# Altium PCB Wctrl-pcb1.PcbDoc (part 1 of 2)
Units mm, origin at the board's own origin, x right, y up, seen from the top; angles counter-clockwise.
Board outline 71 x 39 mm, 4 copper layers (Top Layer, Layer 1, Layer 2, Bottom Layer), stack 1.812 mm thick; 64 components, 75 nets, 267 pads, 81 vias.
Unrouted connection lines stored in the file: 1.
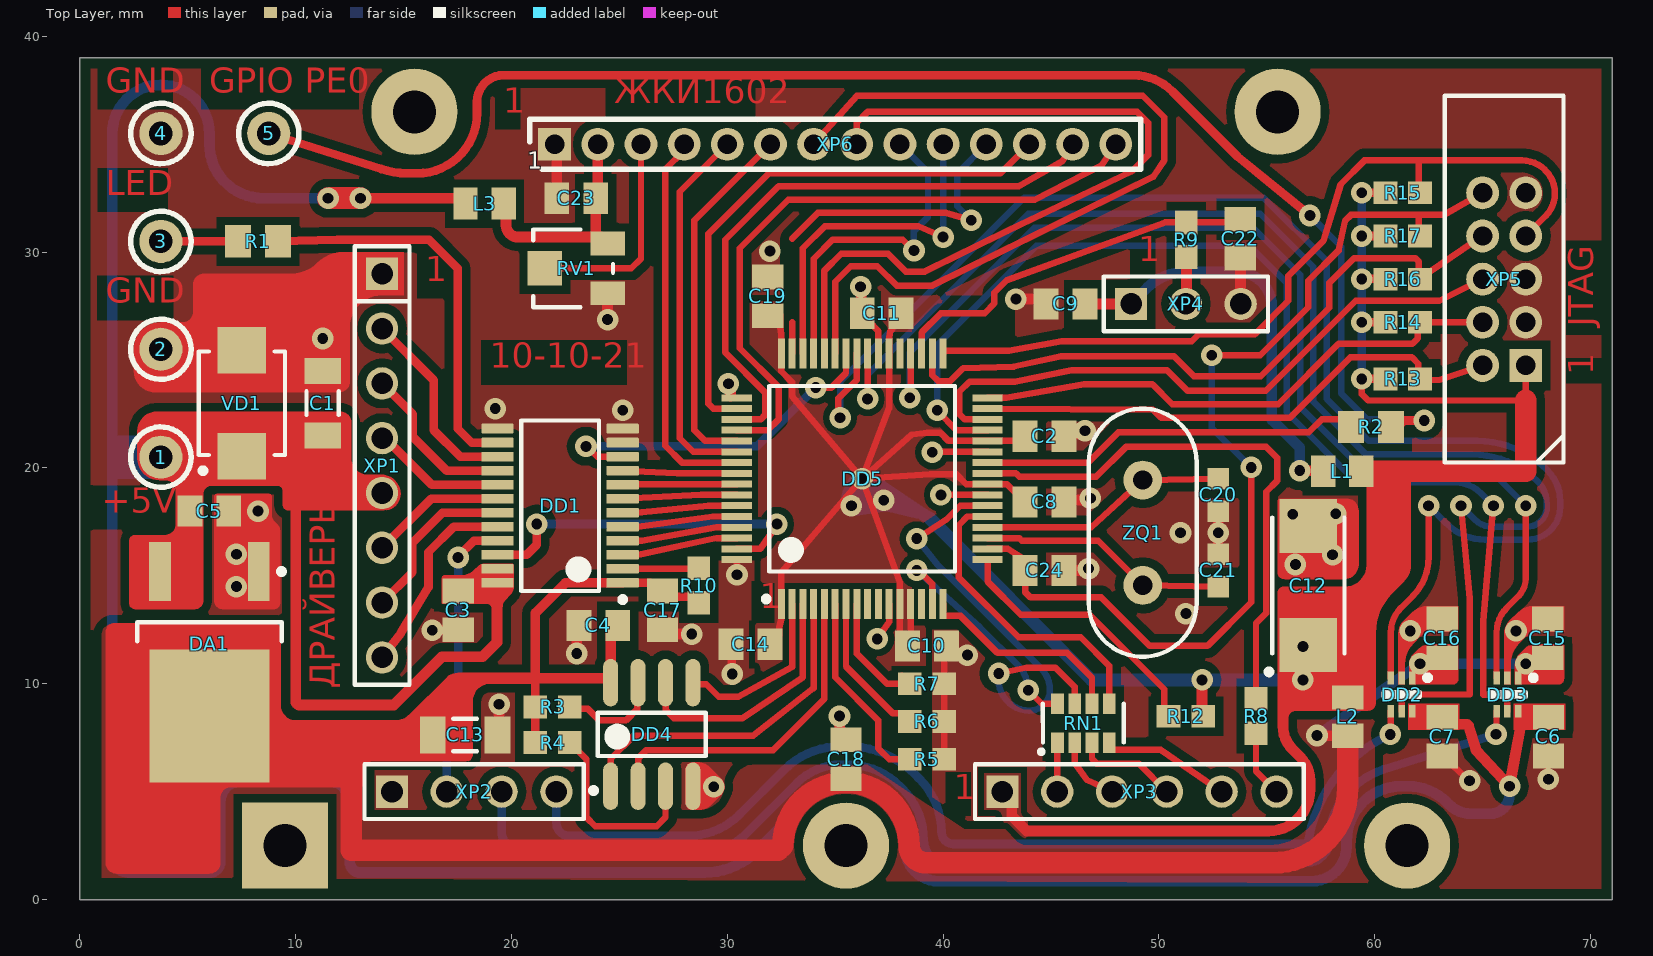
[diagram p0: Top Layer view]
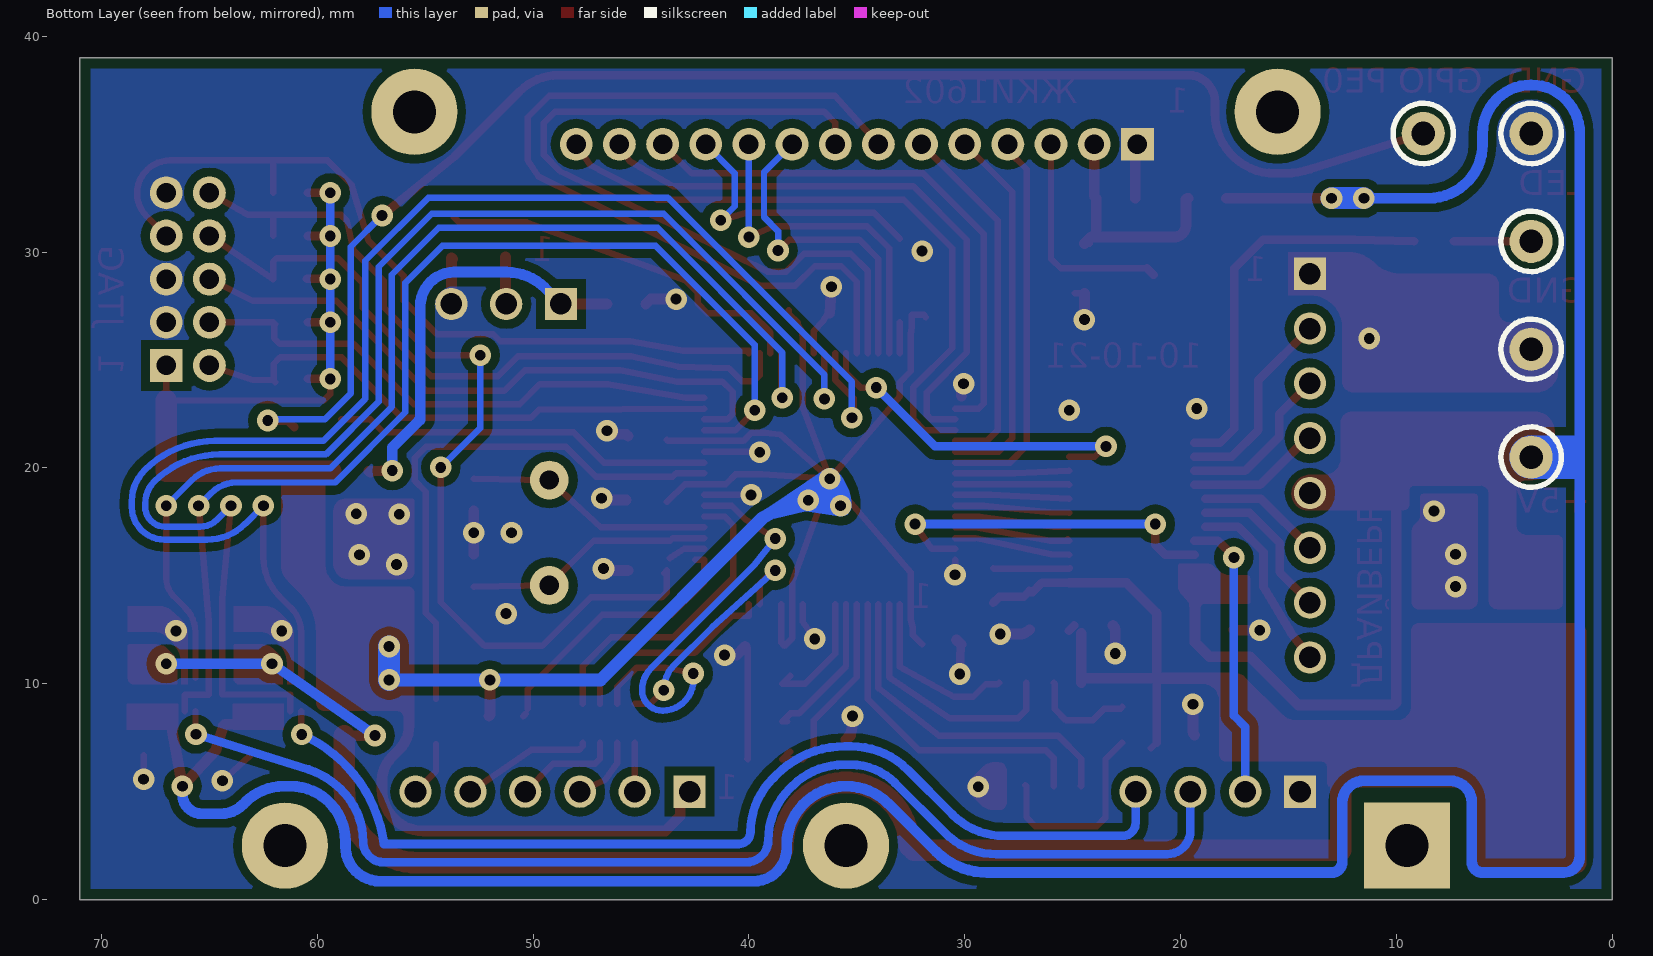
[diagram p1: Bottom Layer view, seen from below]

## Layer stack, top to bottom
Top Solder: solder mask 0.0102, Solder Resist, Dk 3.5
Top Layer: signal copper 0.05
Dielectric 1: prepreg 0.0711, PP-006, Dk 4.1
Layer 1: signal copper 0.035
Core: core 1.5, Dk 4.6
Layer 2: signal copper 0.035
Dielectric 2: prepreg 0.0711, PP-006, Dk 4.1
Bottom Layer: signal copper 0.05
Bottom Solder: solder mask 0.0102, Solder Resist, Dk 3.5

## Board outline
0,39 0,0 71,0 71,39

## Design rules (kind name [scope] priority, off if disabled: settings)
Clearance Clearance_2 [All vs InNamedPolygon('+VM_L01_P010')] p1: gap=0.3 ignorepadtopadclearanceinfootprint=FALSE
Clearance [All vs InPolygon] p2: gap=0.4 ignorepadtopadclearanceinfootprint=FALSE
Clearance Clearance_1 [All] p3: gap=0.15 ignorepadtopadclearanceinfootprint=FALSE
ComponentClearance [All] p1: gap=0 collisioncheckmode=3 verticalgap=0.254 showdistances=FALSE
Height [All] p1: minheight=0 maxheight=30 prefheight=12.7
MinimumSolderMaskSliver [All] p1: minsoldermaskwidth=0
PlaneConnect [All] p1: planeconnectstyle=Relief reliefexpansion=0.508 reliefentries=4 reliefconductorwidth=0.4 reliefairgap=0.254
PolygonConnect [All] p1: connectstyle=Direct reliefconductorwidth=0.4 reliefentries=4 polygonreliefangle="90 Angle" airgapwidth=0.254
RoutingVias [All] p1: holewidth=0.5 width=1 viastyle="Through Hole" minholewidth=0.2 minwidth=0.4 maxholewidth=1 maxwidth=2
SilkToSilkClearance [All] p1: silktosilkclearance=0
SilkToSolderMaskClearance [IsPad] p1: minsilkscreentomaskgap=0 clearancetoexposedcopper=TRUE
SolderMaskExpansion [All] p1: expansion=0.102
Width [All] p1: maxlimit=5 minlimit=0.2 preferedwidth=0.254
24 further rules are at their usual default settings.

## Components (designator, comment, footprint, x,y, rotation, side; value= is the part's Value field where it differs from the comment)
1 "Точка пайки" "Pad X 1.0 Round" 3.75,20.5 r90 top
2 "Точка пайки" "Pad X 1.0 Round" 3.75,25.5 r90 top
3 "Точка пайки" "Pad X 1.0 Round" 3.75,30.5 r90 top
4 "Точка пайки" "Pad X 1.0 Round" 3.75,35.5 r90 top
5 "Точка пайки" "Pad X 1.0 Round" 8.75,35.5 r90 top
C1 "GRM31CR71E475K" "GRM31C R1" 11.25,23 r270 top value=4.7u
C2 "GRM21BR71H104K" "CAPC 0805 T1" 44.7,21.475 r180 top value=0.1u
C3 "GRM21BR71H104K" "CAPC 0805 T1" 17.525,13.4 r90 top value=0.1u
C4 "GRM21BR71H104K" "CAPC 0805 T1" 24.025,12.7 r0 top value=0.1u
C5 "GRM21BR71H104K" "CAPC 0805 T1" 6,18 r180 top value=0.1u
C6 "GRM21BR71H104K" "CAPC 0805 T1" 68.05,7.55 r270 top value=0.1u
C7 "GRM21BR71H104K" "CAPC 0805 T1" 63.125,7.55 r270 top value=0.1u
C8 "GRM21BR71H104K" "CAPC 0805 T1" 44.7,18.425 r180 top value=0.1u
C9 "GRM21BR71H104K" "CAPC 0805 T1" 45.675,27.6 r0 top value=0.1u
C10 "GRM21BR71H104K" "CAPC 0805 T1" 39.25,11.75 r180 top value=0.1u
C11 "GRM21BR71H104K" "CAPC 0805 T1" 37.15,27.175 r0 top value=0.1u
C12 "К53-68 \"C\"-20В-10 мкФ±10%" К53-68-C 56.925,14.55 r90 top value=10u
C13 "GRM31CR71C106K" "GRM31C R1" 17.85,7.625 r180 top value=10u
C14 "GRM21BR71H104K" "CAPC 0805 T1" 31.075,11.825 r0 top value=0.1u
C15 "GRM21BR71H104K" "CAPC 0805 T1" 68.025,12.1 r270 top value=0.1u
C16 "GRM21BR71H104K" "CAPC 0805 T1" 63.125,12.1 r270 top value=0.1u
C17 "GRM21BR71H104K" "CAPC 0805 T1" 27,13.4 r90 top value=0.1u
C18 "GRM21BR71H104K" "CAPC 0805 T1" 35.5,6.5 r270 top value=0.1u
C19 "GRM21BR71H104K" "CAPC 0805 T1" 31.875,27.95 r270 top value=0.1u
C20 "GRM1885C1H180J" "CAPC 0603 T1" 52.75,18.75 r90 top value=18
C21 "GRM1885C1H180J" "CAPC 0603 T1" 52.75,15.25 r270 top value=18
C22 "GRM2165C1H392J" "CAPC 0805 T1" 53.775,30.625 r90 top value=3900
C23 "GRM21BR71H104K" "CAPC 0805 T1" 23,32.5 r0 top value=0.1u
C24 "GRM21BR71H104K" "CAPC 0805 T1" 44.7,15.25 r180 top value=0.1u
DA1 "TLV1117-33IKVURG3" "TO-252_TI_KVU (KVU0003A)_R1" 6,11 r270 top
DD1 "SN74LVC8T245PWR" "TSSOP24_TI_PW (PW0024A)" 22.25,18.25 r180 top locked
DD2 "SN74LVC1T45DRLR" SOT-5x3_TI_DRL(R-PDSO-N6) 61.25,9.5 r270 top
DD3 "SN74LVC1T45DRLR" SOT-5x3_TI_DRL(R-PDSO-N6) 66.15,9.5 r270 top
DD4 "GD25Q21BTIG" "SOIC-8 IPC N" 26.5,7.65 r90 top
DD5 "К1986ВЕ92QI" К1986ВЕ92QI 36.25,19.5 r90 top locked
L1 "Дроссель BLM" INDC2012X10N 58.5,19.85 r0 top value=n
L2 "Дроссель BLM" INDC2012X10N 58.75,8.475 r90 top value=n
L3 "Дроссель BLM" INDC2012X10N 18.75,32.25 r0 top value=n
R1 "Резистор" "IEC 2012N" 8.25,30.5 r0 top value=330
R2 "Резистор" "IEC 2012N" 59.825,21.9 r180 top value=330
R3 "Резистор" "IEC 2011N" 21.9,8.925 r0 top value=4.7k
R4 "Резистор" "IEC 2011N" 21.9,7.275 r0 top value=4.7k
R5 "Резистор" "IEC 2011N" 39.25,6.5 r180 top value=47k
R6 "Резистор" "IEC 2011N" 39.25,8.25 r180 top value=47k
R7 "Резистор" "IEC 2011N" 39.25,10 r180 top value=47k
R8 "Резистор" "IEC 2011N" 54.5,8.5 r90 top value=22
R9 "Резистор" "IEC 2011N" 51.275,30.575 r90 top value=22
R10 "Резистор" "IEC 2011N" 28.675,14.55 r270 top value=4.7k
R12 "Резистор" "IEC 2011N" 51.25,8.5 r0 top value=47k
R13 "Резистор" "IEC 2011N" 61.3,24.125 r180 top value=47k
R14 "Резистор" "IEC 2011N" 61.3,26.75 r180 top value=47k
R15 "Резистор" "IEC 2011N" 61.3,32.75 r180 top value=47k
R16 "Резистор" "IEC 2011N" 61.3,28.75 r180 top value=47k
R17 "Резистор" "IEC 2011N" 61.3,30.75 r180 top value=47k
RN1 "CAT16-220J4LF" "НР1-2Р V1" 46.5,8.175 r0 top value=22
RV1 "Резистор подстроечный" 3313J-1 23,29.25 r90 top value=20k
VD1 "Стабилитрон" SMBJ-LF-R1 7.5,23 r90 top
XP1 "X8 Connector XP" СНП346-8ВП21-1 14,29 r270 top
XP2 "X4 Connector XP" СНП346-4ВП21-1 14.46,5 r0 top
XP3 "X6 Connector XP" СНП346-6ВП21-1 42.75,5 r0 top
XP4 "X3 Connector XP" СНП346-3ВП21-1 48.71,27.6 r0 top
XP5 "X10 Connector XP" DS1014-10SF1B 66,28.75 r90 top
XP6 "X14 Connector XP" DS1025-01-1X14 22,35 r0 top
ZQ1 "Кварц 2к" "HC-49S AS TXC" 49.25,17 r270 top

## Footprints (in the part's own frame and the unit in brackets; to place one, negate y for a bottom-side part, rotate by r counter-clockwise, add the part's x,y. Pads: shape width x height; smd on the part's side, far side on the other; paste and mask are expansions set on the pad)
3313J-1 [mm] "Bourns 3313 - 3 mm Trimpot Trimming Potentiometer"
  rect 1.1x1.6 smd mask+0.07: 1(1.15,-1.45) 3(-1.15,-1.45)
  rect 1.6x1.6 smd mask+0.07: 2(0,1.45)
  silkscreen extent -1.8,-1.7 1.8,2, body extent -1.65,-1.68 1.65,1.83, height 2.14
"CAPC 0603 T1" [mm]
  rect 1x1 smd mask+0.05: 1(-0.75,0) 2(0.75,0)
  body extent -0.85,-0.45 0.85,0.45, height 0.9
"CAPC 0805 T1" [mm]
  rect 1.15x1.45 smd mask+0.05: 1(-0.9,0) 2(0.9,0)
  body extent -1,-0.63 1,0.63, height 1.35
DS1014-10SF1B [mm]
  rect 1.524x1.524 hole 0.9: 1(-4,-1)
  round 1.524 hole 0.9: 2(-4,1) 3(-2,-1) 4(-2,1) 5(0,-1) 6(0,1) 7(2,-1) 8(2,1) 9(4,-1) 10(4,1)
  silkscreen extent -8.5,-2.75 8.5,2.75, body extent -8.55,-2.7 8.55,2.7, height 5.6
DS1025-01-1X14 [mil]
  rect 60x60 hole 35.43: 1(0,0)
  round 60 hole 35.43: 2(78.74,0) 3(157.48,0) 4(236.22,0) 5(314.96,0) 6(393.7,0) 7(472.44,0) 8(551.18,0) 9(629.92,0) 10(708.66,0) 11(787.4,0) 12(866.14,0) 13(944.88,0) 14(1023.62,0)
  silkscreen extent -45,-45 1069,45, body extent -39,-39 1063,39, height 236
"GRM31C R1" [mm]
  rect 1.2x1.7 smd mask+0.05: 1(-1.5,0) 2(1.5,0)
  silkscreen extent -0.55,-0.75 0.55,0.75, body extent -1.7,-0.9 1.7,0.9, height 1.8
"HC-49S AS TXC" [mm] "Low Profile Crystal Unit"
  round 1.8 hole 0.9: 1(-2.44,0) 2(2.44,0)
  silkscreen extent -5.75,-2.5 5.75,2.5, body extent -5.75,-2.5 5.75,2.5, height 3.68
"IEC 2011N" [mm] "Резистор 0603 (метр. 1608) уровень 2. ТПМ # 2011N ГОСТ IEC 61188-5-2-2013"
  rect 1.1x1.05 smd: 1(-0.8,0) 2(0.8,0)
  body extent -0.85,-0.45 0.85,0.45, height 0.55
"IEC 2012N" [mm] "Резистор 0805 (метр. 2012) уровень 2. ТПМ # 2012N ГОСТ IEC 61188-5-2-2013"
  rect 1.2x1.5 smd: 1(-0.925,0) 2(0.925,0)
  body extent -1.05,-0.67 1.05,0.67, height 0.65
INDC2012X10N [mm] "Chip Inductor, 2-Leads, Body 2,00x1,25mm, IPC Medium Density"
  rect 1.13x1.47 smd mask+0.05: 1(-0.885,0) 2(0.885,0)
  body extent -1.1,-0.72 1.1,0.72, height 1.05
"Pad X 1.0 Round" [mm] "Pad with hole D=1.0, for wire"
  round 2 hole 1.1: 1(0,0)
  silkscreen extent -1.4,-1.4 1.4,1.4
SMBJ-LF-R1 [mm] "DO-214AA (SMB J-Bend) by Littelfuse, Polar"
  rect 2.16x2.26 smd mask+0.05: 1(-2.45,0) 2(2.45,0)
  silkscreen extent -3.25,-2 2.4,2, body extent -2.6,-1.97 2.6,1.97, height 2.61
"SOIC-8 IPC N" [mm] "Корпус SOIC, 8-Leads, Body 5,0x4,0mm (max), Pitch 1,27mm, IPC Medium Density"
  oval 2.2x0.7 smd paste+0 mask+0.05: 1(-2.4,1.905) 2(-2.4,0.635) 3(-2.4,-0.635) 4(-2.4,-1.905) 5(2.4,-1.905) 6(2.4,-0.635) 7(2.4,0.635) 8(2.4,1.905)
  silkscreen extent -2.72,-2.5 1,2.82, body extent -3.1,-2.5 3.1,2.5, height 1.75
SOT-5x3_TI_DRL(R-PDSO-N6) [mm] "SOT-5x3, 6-Leads, Body 1,70x1,30mm, Pitch 0,50mm, IPC Medium Density, 4205622-3/D 08/2007"
  rect 0.6x0.3 smd paste+0 mask+0.05: 1(-0.775,0.5) 2(-0.775,0) 3(-0.775,-0.5) 4(0.775,-0.5) 5(0.775,0) 6(0.775,0.5)
  silkscreen extent -0.9,-0.85 0.1,1.33, body extent -0.8,-0.85 0.8,0.85, height 0.6
"TO-252_TI_KVU (KVU0003A)_R1" [mm] "D-PAK by Texas Instr. - TO-252 - 4218915/A (02/2017), Recommended LAND PATTERN"
  rect 2.75x1 smd paste+0 mask+0.05: 1(-4.2,2.29) 3(-4.2,-2.29)
  rect 6.15x5.55 smd paste+0 mask+0.05: 4(2.5,0)
  silkscreen extent -4.32,-3.35 -0.97,3.47, body extent -4.09,-3.35 5.81,3.35, height 2.52
"TSSOP24_TI_PW (PW0024A)" [mm] "Texas Instruments PW0024A, 4220208/A (02/2017)"
  rrect20% 1.5x0.45 smd mask+0.05: 1(-2.9,3.575) 2(-2.9,2.925) 3(-2.9,2.275) 4(-2.9,1.625) 5(-2.9,0.975) 6(-2.9,0.325) 7(-2.9,-0.325) 8(-2.9,-0.975) 9(-2.9,-1.625) 10(-2.9,-2.275) 11(-2.9,-2.925) 12(-2.9,-3.575) 13(2.9,-3.575) 14(2.9,-2.925) 15(2.9,-2.275) 16(2.9,-1.625) 17(2.9,-0.975) 18(2.9,-0.325) 19(2.9,0.325) 20(2.9,0.975) 21(2.9,1.625) 22(2.9,2.275) 23(2.9,2.925) 24(2.9,3.575)
  silkscreen extent -3.03,-3.95 1.8,4.47, body extent -3.2,-3.95 3.2,3.95, height 1.2
К53-68-C [mm] "ТПМ #2063N по ГОСТ IEC 61188-5-2-13"
  rect 2.5x2.65 smd mask+0.05: 1(-2.75,0) 2(2.75,0)
  silkscreen extent -4.12,-1.68 3.15,1.95, body extent -3.15,-1.75 3.15,1.75, height 2.8
К1986ВЕ92QI [mm] "LQFP64 по ГОСТ IEC 61188-5-5-2013, уровень 2"
  rect 1.4x0.324 smd paste+0 mask+0.05: 1(-5.81,3.75) 2(-5.81,3.25) 3(-5.81,2.75) 4(-5.81,2.25) 5(-5.81,1.75) 6(-5.81,1.25) 7(-5.81,0.75) 8(-5.81,0.25) 9(-5.81,-0.25) 10(-5.81,-0.75) 11(-5.81,-1.25) 12(-5.81,-1.75) 13(-5.81,-2.25) 14(-5.81,-2.75) 15(-5.81,-3.25) 16(-5.81,-3.75) 33(5.81,-3.75) 34(5.81,-3.25) 35(5.81,-2.75) 36(5.81,-2.25) 37(5.81,-1.75) 38(5.81,-1.25) 39(5.81,-0.75) 40(5.81,-0.25) 41(5.81,0.25) 42(5.81,0.75) 43(5.81,1.25) 44(5.81,1.75) 45(5.81,2.25) 46(5.81,2.75) 47(5.81,3.25) 48(5.81,3.75)
  rect 0.324x1.4 smd paste+0 mask+0.05: 17(-3.75,-5.81) 18(-3.25,-5.81) 19(-2.75,-5.81) 20(-2.25,-5.81) 21(-1.75,-5.81) 22(-1.25,-5.81) 23(-0.75,-5.81) 24(-0.25,-5.81) 25(0.25,-5.81) 26(0.75,-5.81) 27(1.25,-5.81) 28(1.75,-5.81) 29(2.25,-5.81) 30(2.75,-5.81) 31(3.25,-5.81) 32(3.75,-5.81) 49(3.75,5.81) 50(3.25,5.81) 51(2.75,5.81) 52(2.25,5.81) 53(1.75,5.81) 54(1.25,5.81) 55(0.75,5.81) 56(0.25,5.81) 57(-0.25,5.81) 58(-0.75,5.81) 59(-1.25,5.81) 60(-1.75,5.81) 61(-2.25,5.81) 62(-2.75,5.81) 63(-3.25,5.81) 64(-3.75,5.81)
  silkscreen extent -5.7,-4.3 4.3,4.57, body extent -6,-6 6,6, height 1.6
"НР1-2Р V1" [mm]
  rect 0.6x0.95 smd mask+0.05: 1(-1.2,-0.9) 2(-0.4,-0.9) 3(0.4,-0.9) 4(1.2,-0.9) 5(1.2,0.9) 6(0.4,0.9) 7(-0.4,0.9) 8(-1.2,0.9)
  silkscreen extent -2.05,-1.42 1.88,0.9, body extent -1.7,-0.9 1.7,0.9, height 0.68
СНП346-3ВП21-1 [mm] "Соединитель однорядный штыревой (вилка) на плату, прямой"
  rect 1.5x1.5 hole 1: 1(0,0)
  round 1.5 hole 1: 2(2.54,0) 3(5.08,0)
  silkscreen extent -1.27,-1.27 6.35,1.27, body extent -1.27,-1.25 6.35,1.25, height 8.8
СНП346-4ВП21-1 [mm] "Соединитель однорядный штыревой (вилка) на плату, прямой"
  rect 1.5x1.5 hole 1: 1(0,0)
  round 1.5 hole 1: 2(2.54,0) 3(5.08,0) 4(7.62,0)
  silkscreen extent -1.27,-1.27 8.89,1.27, body extent -1.27,-1.25 8.89,1.25, height 8.8
СНП346-6ВП21-1 [mm] "Соединитель однорядный штыревой (вилка) на плату, прямой"
  rect 1.5x1.5 hole 1: 1(0,0)
  round 1.5 hole 1: 2(2.54,0) 3(5.08,0) 4(7.62,0) 5(10.16,0) 6(12.7,0)
  silkscreen extent -1.27,-1.27 13.97,1.27, body extent -1.27,-1.25 13.97,1.25, height 8.8
СНП346-8ВП21-1 [mm] "Соединитель однорядный штыревой (вилка) на плату, прямой"
  rect 1.5x1.5 hole 1: 1(0,0)
  round 1.5 hole 1: 2(2.54,0) 3(5.08,0) 4(7.62,0) 5(10.16,0) 6(12.7,0) 7(15.24,0) 8(17.78,0)
  silkscreen extent -1.27,-1.27 19.05,1.27, body extent -1.27,-1.25 19.05,1.25, height 8.8

## Part data
1 2 3 4 5: library part 7000042, Part Number="Точка п", CompClass=_, CompID=7000042, ComponentLink1Description=Описание, ComponentLink1URL="\\srv-4\AltiumBase$\Datasheets\Переключатель ПКн159 АУБК.642130.004 ТУ (ОТК).pdf", CompSource=Покупное, DateStamp="09.09.2020 15:49:02", Full Name="_ Точка п", Grade=Неизвестно, Mass=0
C1: library part 2000751, "10 мкФ ±10% X7R 25В, 1206 (3,2x1,6мм)", Capacitance="4,7 мк", Dielectric=X7R, MaxVoltage="25 В", Tolerance=±10%, TU_Manufacturer="ф. Murata, Япония", BomSection="Прочие изделия", CompClass=Конденсатор, CompID=2000751, ComponentLink1Description="Описание серии", ComponentLink1URL="\\srv-4\AltiumBase$\Datasheets\Murata Chip Monolithic Ceramic Capacitors.pdf", CompSource=Покупное, DateStamp="25.10.2019 17:08:07", Full Name="Конденсатор GRM31CR71E475K ф. Murata, Япония", Group1=Постоянный, Mount=Поверхностный, Part Number=GRM31CR71E475K
C2 C3 C4 C5 C6 C7 C8 C9 C10 C11 C14 C15 C16 C17 C18 C19 C23 C24: library part 2000024, "0,1 мкФ ±10% X7R 50В (2,0х1,25 мм)", Capacitance="0,1 мк", Dielectric=X7R, MaxVoltage="50 В", Tolerance=±10%, TU_Manufacturer="ф. Murata, Япония", BomSection="Прочие изделия", CompClass=Конденсатор, CompID=2000024, ComponentLink1Description="Описание серии", ComponentLink1URL="\\srv-4\AltiumBase$\Datasheets\Murata Chip Monolithic Ceramic Capacitors.pdf", CompSource=Покупное, DateStamp="21.01.2019 16:24:00", Full Name="Конденсатор GRM21BR71H104K ф. Murata, Япония", Group1=Постоянный, Mount=Поверхностный, Part Number=GRM21BR71H104K
C12: library part 2000516, "Танталовый, тип C", Capacitance="10 мк", MaxVoltage="20 B", Tolerance=±10%, TU_Manufacturer="АЖЯР.673546.007 ТУ", BomSection="Прочие изделия", CompClass=Конденсатор, CompID=2000516, ComponentLink1Description=Описание, ComponentLink1URL="\\srv-4\AltiumBase$\Datasheets\Конденсатор К53-68 АЖЯР.673546.007 (Описание).pdf", ComponentLink2Description="Технические условия", ComponentLink2URL="\\srv-4\AltiumBase$\Datasheets\Конденсатор К53-68 АЖЯР.673546.007 ТУ.PDF", CompSource=Покупное, DateStamp="28.08.2017 13:59:17", Full Name="Конденсатор К53-68 \"C\"-20В-10 мкФ±10% АЖЯР.673546.007 ТУ", Grade=ВП, Group1=Постоянный, Mass=0,3, Mount=Поверхностный, Part Number="К53-68 \"C\"-20В-10 мкФ±10%"
C13: library part 2000746, "10 мкФ, ±10% X7R 16В, 1206 (3,2x1,6x1,6 мм)", Capacitance="10 мк", Dielectric=X7R, MaxVoltage="16 В", Tolerance=±10%, TU_Manufacturer="ф. Murata, Япония", BomSection="Прочие изделия", CompClass=Конденсатор, CompID=2000746, ComponentLink1Description="Описание серии", ComponentLink1URL="\\srv-4\AltiumBase$\Datasheets\Murata Chip Monolithic Ceramic Capacitors.pdf", ComponentLink2Description="Описание серии", ComponentLink2URL="\\srv-4\AltiumBase$\Datasheets\Murata Chip Multilayer Ceramic Capacitors for General_Nov.27,2017.pdf", CompSource=Покупное, DateStamp="26.07.2019 16:08:08", Full Name="Конденсатор GRM31CR71C106K ф. Murata, Япония", Grade=Military, Group1=Постоянный, Mount=Поверхностный, Part Number=GRM31CR71C106K
C20 C21: library part 2000015, "18 пФ ±5% C0G 50В (1,6x0,8мм)", Capacitance=18, Dielectric=C0G, MaxVoltage="50 В", Tolerance=±5%, TU_Manufacturer="ф. Murata, Япония", BomSection="Прочие изделия", CompClass=Конденсатор, CompID=2000015, ComponentLink1Description="Описание серии", ComponentLink1URL="\\srv-4\AltiumBase$\Datasheets\Murata Chip Monolithic Ceramic Capacitors.pdf", CompSource=Покупное, DateStamp="16.07.2019 14:41:21", Full Name="Конденсатор GRM1885C1H180J ф. Murata, Япония", Group1=Постоянный, Mount=Поверхностный, Part Number=GRM1885C1H180J
C22: library part 2000921, "3900 пФ ±5% C0G 50В (2,0х1,25 мм)", Capacitance=3900, Dielectric=C0G, MaxVoltage="50 В", Tolerance=±5%, TU_Manufacturer="ф. Murata, Япония", BomSection="Прочие изделия", CompClass=Конденсатор, CompID=2000921, ComponentLink1Description="Описание серии", ComponentLink1URL="\\srv-4\AltiumBase$\Datasheets\Murata Chip Monolithic Ceramic Capacitors.pdf", CompSource=Покупное, DateStamp="30.08.2021 19:07:48", Full Name="Конденсатор GRM2165C1H392J ф. Murata, Япония", Group1=Постоянный, Mount=Поверхностный, Part Number=GRM2165C1H392J
DA1: library part 6000109, "3,3V Fixed Low-Dropout Voltage Regulator, TO-252", TU_Manufacturer="ф. Texas Instruments, США", BomSection="Прочие изделия", CompClass=Микросхема, CompID=6000109, ComponentLink1Description=Datasheet, ComponentLink1URL="\\srv-4\AltiumBase$\Datasheets\Микросхема TLV1117 ф. Texas Instruments.pdf", CompSource=Покупное, DateStamp="23.10.2020 11:46:57", Full Name="Микросхема TLV1117-33IKVURG3 ф. Texas Instruments, США", Grade=Industrial, Group1=Стабилизатор, Mass=1, Mount=Поверхностный, Part Number=TLV1117-33IKVURG3
DD1: library part 6000343, "Dual-Supply Bus Transceiver (8-bit) with 3-State Outputs, TSSOP-24", TU_Manufacturer="ф. Texas Instruments, США", BomSection="Прочие изделия", CompClass=Микросхема, CompID=6000343, ComponentLink1Description="Лист данных", ComponentLink1URL="\\srv-4\AltiumBase$\Datasheets\Микросхема SN74LVC8T245PWR ф. Texas Instruments, США.pdf", CompSource=Покупное, DateStamp="21.10.2020 20:41:47", Full Name="Микросхема SN74LVC8T245PWR ф. Texas Instruments, США", Grade=Industrial, Group1=Буфер, Mass=0.5, Mount=Поверхностный, Part Number=SN74LVC8T245PWR
DD2 DD3: library part 6000189, "Single-Bit Dual-Supply Bus Transceiver With Configurable Voltage Translation and 3-State Outputs", TU_Manufacturer="ф. Texas Instruments, США", BomSection="Прочие изделия", CompClass=Микросхема, CompID=6000189, ComponentLink1Description=Datasheet, ComponentLink1URL="\\srv-4\AltiumBase$\Datasheets\Микросхема SN74LVC1T45 ф.Texas Instruments.pdf", CompSource=Покупное, DateStamp="18.08.2020 17:15:56", Full Name="Микросхема SN74LVC1T45DRLR ф. Texas Instruments, США", Grade=Industrial, Group1=Трансивер, Mount=Поверхностный, Part Number=SN74LVC1T45DRLR
DD4: library part 6000282, "Serial Flash 2M-bit, [SPI x 1 / x 2 / x 4], 3,3V, 104 MHz, SOP8", TU_Manufacturer="ф. GigaDevice, Китай", BomSection="Прочие изделия", CompClass=Микросхема, CompID=6000282, ComponentLink1Description=Datasheet, ComponentLink1URL="\\srv-4\AltiumBase$\Datasheets\Микросхема GD25Q21B ф. GigaDevice, Китай.pdf", CompSource=Покупное, DateStamp="19.08.2020 15:13:02", Full Name="Микросхема GD25Q21BTIG ф. GigaDevice, Китай", Grade=Industrial, Group1=ПЗУ, Mount=Поверхностный, Part Number=GD25Q21BTIG
DD5: library part 6000008, "МК, 32-битное ядро ARM Cortex M3 80 МГц, LQFP64", TU_Manufacturer="АЕЯР.431290.711 ТУ", BomSection="Прочие изделия", CompClass=Микросхема, CompID=6000008, ComponentLink1Description=Спецификация, ComponentLink1URL="\\srv-4\AltiumBase$\Datasheets\Микросхема 1986ВЕ9X АЕЯР.431290.711 ТУ.pdf", CompSource=Покупное, DateStamp="05.10.2020 17:56:44", Full Name="Микросхема К1986ВЕ92QI АЕЯР.431290.711 ТУ", Grade=ОТК, Group1=Микроконтроллер, Mount=Поверхностный, Part Number=К1986ВЕ92QI
L1 L2 L3: library part 3000459, "Chip Ferrite Bead BLM21_SN series - 200 mA, 470 Ohm (@100 MHz), 0805", Inductance=н, MaxCurrent="0.2 A", Part Number=BLM21AG471SN1, Tolerance=25%, TU_Manufacturer="ф. Murata, Япония", BomSection="Прочие изделия", CompClass=Дроссель, CompID=3000459, ComponentLink1Description="Лист данных", ComponentLink1URL="\\srv-4\AltiumBase$\Datasheets\Дроссели типа BLM21PG, BLM31PG ф. Murata, Япония.pdf", ComponentLink2Description="Описание серии", ComponentLink2URL="\\srv-4\AltiumBase$\Datasheets\Дроссели BLM ф. Murata, США.pdf", CompSource=Покупное, DateStamp="31.10.2019 19:35:14", DCR=0.25, Full Name="Дроссель BLM21AG471SN1 ф. Murata, Япония", Grade=Military, Mass=0.001, Mount=Поверхностный
R1 R2: library part 1001102, "Чип-резистор 0805", MaxPower="0,125 Вт", Part Number="Р1-12-0,125-330 Ом±5%-Т", Resistance=330, Tolerance=±5%, TU_Manufacturer="АЛЯР.434110.005 ТУ", BomSection="Прочие изделия", CompClass=Резистор, CompID=1001102, ComponentLink1Description=Описание, ComponentLink1URL="\\srv-4\AltiumBase$\Datasheets\Резистор Р1-12 АЛЯР.434110.005 ТУ.pdf", CompSource=Покупное, DateStamp="15.05.2017 16:43:07", Full Name="Резистор Р1-12-0,125-330 Ом±5%-Т АЛЯР.434110.005 ТУ", Grade=ВП, Group1=Постоянный, Mass=0,01, Mount=Поверхностный, TCR=Т
R3 R4 R10: library part 1000329, "Чип-резистор 0603", MaxPower="0,1 Вт", Part Number="Р1-12-0,1-4,7 кОм±5%-Т", Resistance="4,7 к", Tolerance=±5%, TU_Manufacturer="АЛЯР.434110.005 ТУ", BomSection="Прочие изделия", CompClass=Резистор, CompID=1000329, ComponentLink1Description=Описание, ComponentLink1URL="\\srv-4\AltiumBase$\Datasheets\Резистор Р1-12 АЛЯР.434110.005 ТУ.pdf", CompSource=Покупное, DateStamp="22.04.2017 17:29:10", Full Name="Резистор Р1-12-0,1-4,7 кОм±5%-Т АЛЯР.434110.005 ТУ", Grade=ВП, Group1=Постоянный, Mass=0,005, Mount=Поверхностный, TCR=Т
R5 R6 R7 R12 R13 R14 R15 R16 R17: library part 1004658, "Чип-резистор 0603", MaxPower="0,1 Вт", Part Number="Р1-12-0,1-47 кОм±1%-М", Resistance="47 к", Tolerance=±1%, TU_Manufacturer="АЛЯР.434110.005 ТУ", BomSection="Прочие изделия", CompClass=Резистор, CompID=1004658, ComponentLink1Description=Описание, ComponentLink1URL="\\srv-4\AltiumBase$\Datasheets\Резистор Р1-12 АЛЯР.434110.005 ТУ.pdf", CompSource=Покупное, DateStamp="31.07.2017 21:00:06", Full Name="Резистор Р1-12-0,1-47 кОм±1%-М АЛЯР.434110.005 ТУ", Grade=ВП, Group1=Постоянный, Mass=0,005, Mount=Поверхностный, TCR=М
R8 R9: library part 1000273, "Чип-резистор 0603", MaxPower="0,1 Вт", Part Number="Р1-12-0,1-22 Ом±5%-Т", Resistance=22, Tolerance=±5%, TU_Manufacturer="АЛЯР.434110.005 ТУ", BomSection="Прочие изделия", CompClass=Резистор, CompID=1000273, ComponentLink1Description=Описание, ComponentLink1URL="\\srv-4\AltiumBase$\Datasheets\Резистор Р1-12 АЛЯР.434110.005 ТУ.pdf", CompSource=Покупное, DateStamp="22.04.2017 17:29:00", Full Name="Резистор Р1-12-0,1-22 Ом±5%-Т АЛЯР.434110.005 ТУ", Grade=ВП, Group1=Постоянный, Mass=0,005, Mount=Поверхностный, TCR=Т
RN1: library part 1009855, "Набор резисторов 4шт х 22 Ом, 0,0625 Вт , 50В, 5%, SMD 3.2 x 1.6 x 0.8", MaxPower="0,062 Вт", Resistance=22, Tolerance=±5%, TU_Manufacturer="ф. Bourns, США", BomSection="Прочие изделия", CompClass=Резистор, CompID=1009855, ComponentLink1Description="Лист данных", ComponentLink1URL="\\srv-4\AltiumBase$\Datasheets\Наборы резисторов CAT16_CAY16_J2_J4LF (BOURNS).pdf", ComponentLink2Description="Отечественный Аналог", ComponentLink2URL="\\srv-4\AltiumBase$\Datasheets\Наборы резисторов НР1-2Р, НР1-3Р, НР1-4Р (лист данных).pdf", CompSource=Покупное, DateStamp="25.08.2021 19:57:49", Device="НР1-2Р-5.1 кОм ±5 %", Full Name="Резистор CAT16-220J4LF ф. Bourns, США", Grade=Industrial, Group1="Набор резисторов", Mass=0,03, Mount=Поверхностный, Part Number=CAT16-220J4LF, Specification=ШКАБ.434110.018ТУ, Title="Набор резисторов", Type="Набор резисторов"
RV1: library part 1009856, "Trimming Potentiometer, 20 kOhm, SMD 3.5 x 3.2 x 2.2", MaxPower=0,125, Part Number=3313J-1-203E, Resistance="20 к", Tolerance=±20%, TU_Manufacturer="ф. Bourns, США", BomSection="Прочие изделия", CompClass=Резистор, CompID=1009856, ComponentLink1Description="Описание серии", ComponentLink1URL="\\srv-4\AltiumBase$\Datasheets\Резистор подстроечный 3313J-1 Bourns.pdf", CompSource=Покупное, DateStamp="06.09.2021 13:21:02", Full Name="Резистор 3313J-1-203E ф. Bourns, США", Grade=AEC-Q200, Group1=Подстроечный, Mass=1, Mount=Штырьевой
VD1: library part 4000045, "TVS Diode, Uni-directional, 12V, DO-214AA (SMB J-Bend)", Part Number=SMBJ12A, TU_Manufacturer="ф. Littelfuse, США", BomSection="Прочие изделия", CompClass=Диод, CompID=4000045, ComponentLink1Description="Описание серии", ComponentLink1URL="\\srv-4\AltiumBase$\Datasheets\Диоды защитные SMBJ ф. Littelfuse, США.pdf", CompSource=Покупное, DateStamp="20.11.2018 17:38:45", Full Name="Диод SMBJ12A ф. Littelfuse, США", Grade=Military, Group1="Диод защитный", Mass=0.093, Mount=Поверхностный
XP1: library part 7000012, "Вилка СНП346 однорядная, прямая, 8 контактов", Part Number=СНП346-8ВП21-1-В, TU_Manufacturer="РЮМК.430420.011 ТУ", BomSection="Прочие изделия", CompClass=Соединитель, CompID=7000012, ComponentLink1Description="Технические условия", ComponentLink1URL="\\srv-4\AltiumBase$\Datasheets\Соединители типа СНП346 РЮМК.430420.011ТУ.PDF", CompSource=Покупное, DateStamp="06.11.2018 13:53:56", Full Name="Соединитель СНП346-8ВП21-1-В РЮМК.430420.011 ТУ", Grade=ВП, Group1=Вилка, Mass=0,48, Mount=Штырьевой, Назначение="\"ДРАЙВЕРЫ\""
XP2: library part 7000008, "Вилка СНП346 однорядная, прямая, 4 контакта", Part Number=СНП346-4ВП21-1-В, TU_Manufacturer="РЮМК.430420.011 ТУ", BomSection="Прочие изделия", CompClass=Соединитель, CompID=7000008, ComponentLink1Description="Технические условия", ComponentLink1URL="\\srv-4\AltiumBase$\Datasheets\Соединители типа СНП346 РЮМК.430420.011ТУ.PDF", CompSource=Покупное, DateStamp="06.11.2018 13:50:24", Full Name="Соединитель СНП346-4ВП21-1-В РЮМК.430420.011 ТУ", Grade=ВП, Group1=Вилка, Mass=0,24, Mount=Штырьевой, Назначение="\"КОНЦЕВИКИ\""
XP3: library part 7000010, "Вилка СНП346 однорядная, прямая, 6 контактов", Part Number=СНП346-6ВП21-1-В, TU_Manufacturer="РЮМК.430420.011 ТУ", BomSection="Прочие изделия", CompClass=Соединитель, CompID=7000010, ComponentLink1Description="Технические условия", ComponentLink1URL="\\srv-4\AltiumBase$\Datasheets\Соединители типа СНП346 РЮМК.430420.011ТУ.PDF", CompSource=Покупное, DateStamp="06.11.2018 13:52:39", Full Name="Соединитель СНП346-6ВП21-1-В РЮМК.430420.011 ТУ", Grade=ВП, Group1=Вилка, Mass=0,36, Mount=Штырьевой, Назначение="\"КНОПКИ\""
XP4: library part 7000007, "Вилка СНП346 однорядная, прямая, 3 контакта", Part Number=СНП346-3ВП21-1-В, TU_Manufacturer="РЮМК.430420.011 ТУ", BomSection="Прочие изделия", CompClass=Соединитель, CompID=7000007, ComponentLink1Description="Технические условия", ComponentLink1URL="\\srv-4\AltiumBase$\Datasheets\Соединители типа СНП346 РЮМК.430420.011ТУ.PDF", CompSource=Покупное, DateStamp="06.11.2018 13:49:37", Full Name="Соединитель СНП346-3ВП21-1-В РЮМК.430420.011 ТУ", Grade=ВП, Group1=Вилка, Mass=0,18, Mount=Штырьевой, Назначение="\"КРУТИЛКА\""
XP5: library part 7000059, "Вилка двухрядная на плату IDC-2-10, прямая, шаг 2  мм, 10 контактов", Part Number=DS1014-10SF1B, TU_Manufacturer="ф. Connfly Electronics, Китай", BomSection="Прочие изделия", CompClass=Соединитель, CompID=7000059, ComponentLink1Description="Лист данных", ComponentLink1URL="\\srv-4\AltiumBase$\Datasheets\Соединитель DS1014 ф. Connfly Electronics.pdf", ComponentLink2Description="Описание серии", ComponentLink2URL="\\srv-4\AltiumBase$\Datasheets\Соединители Серии IDC (серия).pdf", CompSource=Покупное, DateStamp="25.11.2020 21:55:25", Full Name="Соединитель DS1014-10SF1B ф. Connfly Electronics, Китай", Grade=Неизвестно, Group1=Вилка, Mass=0,6, Mount=Штырьевой, Назначение="\"JTAG\""
XP6: library part 7000095, "Вилка на плату, прямая, шаг 2,0 мм, 14 контактов", Part Number=DS1025-01*14P8BV2, TU_Manufacturer="ф. Connfly Electronics, Китай", BomSection="Прочие изделия", CompClass=Соединитель, CompID=7000095, ComponentLink1Description="Лист данных", ComponentLink1URL="\\srv-4\AltiumBase$\Datasheets\Соединитель DS1025-01 ф. Connfly Electronics.pdf", ComponentLink2URL="\\srv-4\AltiumBase$\Datasheets\Соединители PLD PLS (Описание типа).pdf", CompSource=Покупное, DateStamp="06.10.2021 17:25:34", Full Name="Соединитель DS1025-01*14P8BV2 ф. Connfly Electronics, Китай", Grade=Неизвестно, Group1=Вилка, Mass=1, Mount=Штырьевой, Назначение="\"ЖКИ1602\""
ZQ1: library part 9000047, "8.000 МHz (Tolerance ±30ppm, Stability ±50ppm, Load Capacitance 12 pF)", Part Number=AS-8.000MAGE, TU_Manufacturer="ф. TXC Corporation, Тайвань", BomSection="Прочие изделия", CompClass=Резонатор, CompID=9000047, ComponentLink1Description="Лист данных", ComponentLink1URL="\\srv-4\AltiumBase$\Datasheets\Кварц HS-49S AS ф. TXC (Datasheet).pdf", ComponentLink2Description="Описание серии", ComponentLink2URL="\\srv-4\AltiumBase$\Datasheets\Кварц HS-49S AS ф. TXC (Number Builder).pdf", CompSource=Покупное, DateStamp="09.10.2020 16:34:34", Full Name="Резонатор AS-8.000MAGE ф. TXC Corporation, Тайвань", Grade=Automotive, Group1="Резонатор кварцевый", Mass=2, Mount=Штырьевой, Частота="8 MHz"

## Free pads (board coordinates)
  rect 4x4 hole 2: 1(9.5,2.5)
  round 4 hole 2: 1(15.5,36.5) 1(35.5,2.5) 1(55.5,36.5) 1(61.5,2.5)

## Via types
v1: diameter 1, hole 0.5, Top Layer to Bottom Layer, tented both sides, 81 vias

## Nets (pads, with @x,y where several pads share a name; then routed paths per layer and width w, separated by ;. In a path a pad name is that pad's centre, name@x,y a point inside that pad or via, vN(x,y) a via of type N, cw(c..) or ccw(c..) an arc to the next point about the centre after c; other vN are vias at no path point)
+3V3: C4.2 C13.2 C15.2 C16.2 C17.2 C18.2 DA1.4 DD1.1 DD2.1 DD3.1 DD4.8 L2.1 R3.1 R4.1 R10.2 | length 107.4
  Top Layer w0.3: R4.1 R4.1@21.375,7
  Top Layer w0.4: R4.1 R3.1 21.1,10.175 ; C4.2 C4.2@25.17,12.455 ; DD1.1 26.425,14.675 26.85,14.25 C17.2@27,14.25 ; C17.2 27.275,14.025 28.4,14.025 R10.2
  Top Layer w0.45: 21.1,10.175 21.1,10.25 21.1,13.275 22.5,14.675 DD1.1
  Top Layer w0.5: C13.2 16.35,9.15 17.45,10.25 21.1,10.25 24.503,10.25 DD4.8@24.595,10.158 ; DD4.8 DD4.8@24.595,10.158 ; C4.2@24.595,12.33 DD4.8@24.595,10.158 ; v1(57.325,7.6) v1@57.315,7.59 ; L2.1 v1@57.315,7.59 ; v1@57.315,7.59 ccw(c57.315,7.55) 57.275,7.55 v1@57.315,7.59
  Top Layer w1: DA1.4 6,5.925 12.575,5.925 12.575,2.275 32.349,2.275 32.574,2.5 cw(c35.5,2.5) 38.426,2.5 ccw(c39.226,2.5) 39.226,1.7 55.302,1.7 ccw(c55.302,5.148) 58.75,5.148 L2.1
  Bottom Layer w0.5: v1(57.325,7.6) v1(62.1,10.925) v1(67,10.925)
+5VIN: 1.1 C1.2 C3.2 C5.2 C6.1 C7.1 DA1.3 DD1.23 DD1.24 DD2.6 DD3.6 L3.1 VD1.1 XP1.5 | length 172.3
  Top Layer w0.5: C1.2 11.25,19.75 10,18.5 10,9.2 ccw(c10.183,9.2) 10.183,9.017 14.542,9.017 16.775,11.25 18.65,11.25 19.325,11.925 DD1.24@19.325,14.575 ; v1(11.5,32.5) v1(13,32.5) L3.1@17.865,32.5 ; C7.1 63.45,8.125 64.275,8.125 64.35,8.05 64.7,6.925 v1(66.25,5.25) 66.75,7.925 66.75,8.45 C6.1
  Bottom Layer w0.5: 1.1 1.5,20.5 ; v1(11.5,32.5) 8.5,32.5 cw(c8.5,35) 6,35 6,35.5 ccw(c3.75,35.5) 3.75,37.75 ccw(c3.75,35.5) 1.5,35.5 1.5,20.5 ; 63.45,4.4 ccw(c64.476,5.426) 64.476,3.975 65.358,3.975 ccw(c65.358,4.867) 66.25,4.867 v1(66.25,5.25) ; 63.45,4.4 63.344,4.506 ccw(c61.548,2.71) 61.548,5.25 61.24,5.25 ccw(c61.24,2.71) 58.7,2.71 58.7,2.471 cw(c57.079,2.471) 57.079,0.85 39.775,0.85 cw(c39.775,2.375) 38.25,2.375 38.25,2.526 ccw(c35.5,2.5) 35.5,5.25 ccw(c35.5,2.474) 33.537,4.437 31.339,2.239 cw(c28.951,4.628) 28.951,1.25 13,1.25 cw(c13,1.75) 12.5,1.75 12.5,4.5 ccw(c11.5,4.5) 11.5,5.5 7.5,5.5 ccw(c7.5,4.5) 6.5,4.5 6.5,1.75 cw(c6,1.75) 6,1.25 2.25,1.25 cw(c2.25,2) 1.5,2 1.5,20.5
+5VL: C23.2 L3.2 RV1.1 XP6.2 | length 11.4
  Top Layer w0.3: XP6.2 XP6.2@24.234,34.766 ; RV1.1@24.2,30.4 RV1.1
  Top Layer w0.5: L3.2@19.635,32.5 cw(c19.635,32.385) 19.75,32.385 19.75,31.25 ccw(c20.3,31.25) 20.3,30.7 RV1.1@23.9,30.7 ; XP6.2 24,34.766 24,32.6 C23.2 RV1.1@23.9,30.7 ; RV1.1 24.15,30.7 RV1.1@23.9,30.7
+VM: C2.2 C8.2 C10.2 C11.2 C12.1 C14.2 C19.2 DD5.1 DD5.12 DD5.13 DD5.24 DD5.28 DD5.38 DD5.48 L1.2 L2.2 R12.2 R13.2 R14.2 R15.2 R16.2 R17.2 XP3.1 XP5.1 | length 139.3
  Top Layer w0.3: C19.2@31.8,26.975 C19.2 ; C19.2@31.875,27.1 32.45,27.1 32.45,26.525 32.5,26.2 DD5.48 32.5,24.475 33,23.975 33,23.325 v1(36.25,19.5) ; C14.2 32.4,12.25 32.4,12.6 32.5,13 DD5.1 32.5,15.175 35.417,18.539 v1(36.25,19.5) ; C11.2@38.15,27.3 38.15,27.15 37.725,26.725 37.725,26.6 37.55,26.325 37.5,26.05 DD5.38 37.5,22.775 v1(36.25,19.5) ; DD5.13 38.5,11.9 C10.2 38,12.1 DD5.12 38,14.675 36.687,18.296 v1(36.25,19.5) ; C8.2 42.95,19.25 DD5.24 41.075,19.25 40.625,19.7 39.4,19.7 v1(36.25,19.5) ; C2.2@43.8,21.3 43.75,21.25 DD5.28 40.25,21.25 39.875,21.625 39.275,21.625 38.55,21.55 v1(36.25,19.5) ; v1(59.4,24.125) 59.4,23.425 59.7,23.125 67,23.125 XP5.1
  Top Layer w0.4: v1(59.4,24.125) R13.2@60.45,24.125 ; v1(59.4,26.75) R14.2@60.45,26.75 ; v1(59.4,30.75) R17.2@60.45,30.75 ; v1(59.4,32.75) R15.2@60.45,32.75 ; v1@59.425,28.775 R16.2@60.475,28.775
  Top Layer w0.5: XP3.1 43.18,4.57 43.18,3.87 43.875,3.175 55.08,3.175 ccw(c55.08,5.095) 57,5.095 57,5.514 ccw(c55.464,5.514) 56.55,6.6 56.2,6.95 cw(c57.286,8.036) 55.75,8.036 55.75,11.8 C12.1 ; v1(52,10.175) 52,8.55 R12.2
  Top Layer w1: L1.2 67,19.85 67,23.125
  Bottom Layer w0.4: v1(59.4,24.125) v1(59.4,26.75) v1(59.4,28.75) v1(59.4,30.75) v1(59.4,32.75)
  Bottom Layer w0.6: v1(36.25,19.5) 37.431,18.81 39.375,17.675 46.875,10.175 v1(52,10.175) v1(56.675,10.175)
  other v1: 56.675,11.725 35.75,18.25 37.25,18.5
+VRE: C9.2 L1.1 XP4.1 | length 19.5
  Top Layer w0.5: C9.2 XP4.1 ; v1(56.525,19.875) L1.1 ; L1.1@57.54,19.8 L1.1@57.54,19.85
  Bottom Layer w0.5: XP4.1 49.441,28.331 cw(c51.237,26.535) 51.237,29.075 53.65,29.075 cw(c53.65,27.5) 55.225,27.5 55.225,22.275 ; 55.3,22.2 cw(c55.3,22.275) 55.268,22.207 ; v1(56.525,19.875) 56.525,20.95 55.268,22.207 ; 55.225,22.275 ccw(c55.3,22.275) 55.232,22.243 ; 55.225,22.275 55.225,22.25 55.232,22.243 ; 55.232,22.243 ccw(c55.3,22.275) 55.268,22.207 ; 55.232,22.243 55.268,22.207
ARE: R9.1 XP4.2 | length 2.2
  Top Layer w0.5: XP4.2 51.275,27.625 R9.1
AUD1: DD2.3 DD5.41 | length 68.3
  Top Layer w0.29: DD2.3 60.75,12.378 cw(c62.372,12.378) 61.225,13.525 61.756,14.056 ccw(c59.96,15.852) 62.5,15.852 v1(62.5,18.25) v1@62.586,18.164
  Top Layer w0.3: v1@35.15,22.125 35.15,23.225 36,24.075 DD5.41
  Bottom Layer w0.3: v1(35.225,22.325) 35.225,24 43.75,32.525 54.85,32.525 57.775,29.6 57.775,23.2 59.725,21.25 64.751,21.25 cw(c64.751,16.665) 67.993,19.907 cw(c66.527,18.441) 68.6,18.441 68.6,18.2 cw(c67.075,18.2) 67.075,16.675 65.127,16.675 cw(c65.127,19.215) 63.331,17.419 v1(62.5,18.25)
AUD2: DD3.3 DD5.36 | length 52.4
  Top Layer w0.29: DD3.3 65.65,12.378 cw(c67.272,12.378) 66.125,13.525 66.656,14.056 ccw(c65.826,14.886) 67,14.886 v1(67,18.25)
  Top Layer w0.3: v1(38.45,23.25) 38.5,23.3 DD5.36
  Bottom Layer w0.3: v1(38.45,23.25) 38.45,25.35 44.225,31.125 54.375,31.125 56.55,28.95 56.55,22.825 59.4,19.975 64.505,19.975 cw(c64.505,18.115) 65.82,19.43 v1(67,18.25)
AUD3: DD1.3 DD5.62 | length 5.4
  Top Layer w0.3: DD1.3 26,16 29.5,16.75 DD5.62
AUX1: DD2.4 XP2.4 | length 48.2
  Top Layer w0.3: v1(60.725,7.65) 60.75,7.675 DD2.4
  Bottom Layer w0.4: XP2.4 22.08,3.545 ccw(c22.675,3.545) 22.675,2.95 28.176,2.95 ccw(c28.176,6.328) 30.564,3.939 32.639,6.014 cw(c35.261,3.391) 35.261,7.1 35.555,7.1 cw(c35.555,2.645) 38.706,5.794 38.9,5.6 cw(c36.424,3.125) 39.925,3.125 ccw(c40.475,3.125) 40.475,2.575 56.91,2.575 ; 56.91,2.596 cw(c63.367,1.688) v1(60.725,7.65)
AUX2: DD3.4 XP2.3 | length 56.3
  Top Layer w0.3: v1@65.645,7.68 DD3.4@65.645,8.73
  Bottom Layer w0.4: XP2.3 19.54,3.185 ccw(c20.625,3.185) 20.625,2.1 28.526,2.1 ccw(c28.526,5.478) 30.914,3.089 33.226,5.401 cw(c35.275,3.353) 35.275,6.25 35.601,6.25 cw(c35.601,2.872) 37.99,5.26 38.108,5.142 cw(c35.715,2.748) 39.1,2.748 ccw(c40.123,2.748) 40.123,1.725 56.921,1.725 ccw(c56.921,2.679) 57.875,2.679 cw(c61.246,2.679) 59.079,5.261 cw(c61.583,2.454) 60.4,6.025 v1(65.62,7.655)
AUX3: DD1.21 XP2.2 | length 13.2
  Top Layer w0.4: v1(17.525,15.85) 17.525,15.891 18.259,16.625 DD1.21
  Bottom Layer w0.4: XP2.2 17,8 17.525,8.525 v1(17.525,15.85)
BCR: R8.1 XP3.6 | length 2.6
  Top Layer w0.3: R8.1@54.5,7.2 54.5,5.95 XP3.6
BLN: RN1.1 XP3.2 | length 2.3
  Top Layer w0.3: XP3.2 45.3,5.01 RN1.1
BLV: RN1.2 XP3.3 | length 3.2
  Top Layer w0.3: RN1.2 46.1,6.325 46.65,5.55 XP3.3
BRN: RN1.4 XP3.5 | length 6.1
  Top Layer w0.3: RN1.4 47.7,7.1 47.85,6.95 50.075,6.95 XP3.5
BRV: RN1.3 XP3.4 | length 4.9
  Top Layer w0.3: RN1.3 46.9,6.525 47.125,6.3 49.07,6.3 XP3.4
BUFD: DD1.2 R10.1 | length 3.6
  Top Layer w0.3: DD1.2@25.12,15.355 DD1.2 28.65,15.325 R10.1
BUFE: DD1.22 DD5.63 | length 16.6
  Top Layer w0.3: DD5.63 31.525,16.25 32.322,17.385 v1@32.35,17.425
  Top Layer w0.4: DD1.22 20.7,15.975 21.166,16.441 v1(21.166,17.4)
  Bottom Layer w0.4: v1(21.166,17.4) v1(32.3,17.4)
CCW1: DD1.8 DD5.57 | length 5.3
  Top Layer w0.3: DD1.8 25.175,19.25 DD5.57
CCW2: DD1.5 DD5.60 | length 5.3
  Top Layer w0.3: DD1.5 25.875,17.275 29.325,17.75 DD5.60
CLK1: DD1.7 DD5.58 | length 5.3
  Top Layer w0.3: DD1.7 28.8,18.75 DD5.58
CLK2: DD1.4 DD5.61 | length 5.5
  Top Layer w0.3: DD1.4@25.225,16.7 DD1.4 26.025,16.625 29.5,17.25 DD5.61
D1CLK: DD1.17 XP1.4 | length 6.2
  Top Layer w0.4: XP1.4 14.145,21.38 16.3,19.225 DD1.17
D1CW: DD1.16 XP1.3 | length 7.6
  Top Layer w0.4: XP1.3 15.425,22.495 15.425,21.45 17,19.875 DD1.16
D1EN: DD1.15 XP1.2 | length 9.2
  Top Layer w0.4: XP1.2 16.4,24.06 16.4,21.75 17.625,20.525 DD1.15
D2CLK: DD1.20 XP1.8 | length 8.7
  Top Layer w0.4: XP1.8 14.875,12.35 16.15,14.475 16.15,16.1 17.325,17.275 DD1.20@18.85,17.275
D2CW: DD1.19 XP1.7 | length 7.4
  Top Layer w0.4: XP1.7 15.4,15.16 15.4,16.525 16.8,17.925 DD1.19@18.85,17.925
D2EN: DD1.18 XP1.6 | length 5.8
  Top Layer w0.4: XP1.6 16.275,18.575 DD1.18@18.85,18.575
DIR1: DD2.5 DD5.40 | length 64.8
  Top Layer w0.29: DD2.5@61.255,8.72 DD2.5 61.25,9.5 64.4,9.5 64.4,13.95 v1(64,18.25)
  Top Layer w0.3: v1(36.5,23.2) DD5.40
  Bottom Layer w0.3: v1(36.5,23.2) 36.5,24.325 43.95,31.775 54.7,31.775 57.15,29.325 57.15,23.075 59.6,20.625 64.532,20.625 cw(c64.532,16.357) 67.55,19.375 cw(c66.524,18.349) 67.975,18.349 67.975,18.2 cw(c67.05,18.2) 67.05,17.275 65.44,17.275 cw(c65.44,18.397) 64.647,17.603 v1(64,18.25)
DIR2: DD3.5 DD5.29 | length 52.4
  Top Layer w0.3: v1@39.775,22.6 40.625,21.75 DD5.29 ; v1(65.5,18.25) 65.025,12.9 65.025,9.5 66.15,9.5 DD3.5
  Bottom Layer w0.3: v1(39.725,22.675) 39.725,25.7 44.325,30.3 54.2,30.3 55.925,28.575 55.925,22.575 59.175,19.325 63.748,19.325 cw(c63.748,17.691) 64.904,18.846 v1(65.5,18.25)
ENA1: DD1.9 DD5.56 | length 5.3
  Top Layer w0.3: DD1.9 27.675,19.75 DD5.56
ENA2: DD1.6 DD5.59 | length 5.3
  Top Layer w0.3: DD1.6 26.025,17.95 29.125,18.25 DD5.59
FARE: C22.2 DD5.35 R9.2 | length 17.5
  Top Layer w0.3: DD5.35 39,26.275 39.9,27.175 41.925,27.175 42.375,27.625 42.375,28.125 42.95,28.7 50.3,31.375 R9.2 53.426,31.375 C22.2@53.676,31.624
GND: 2.1 4.1 C1.1 C2.1 C3.1 C4.1 C5.1 C6.2 C7.2 C8.1 C9.1 C10.1 C11.1 C12.2 C13.1 C14.1 C15.1 C16.1 C17.1 C18.1 C19.1 C20.1 C21.1 C22.1 C23.1 C24.1 DA1.1 DD1.11 DD1.12 DD1.13 DD2.2 DD3.2 DD4.4 DD5.11 DD5.23 DD5.27 DD5.39 DD5.49 DD5.64 R5.1 R6.1 R7.1 RV1.3 VD1.2 XP1.1 XP2.1 XP4.3 XP5.3 XP5.5 XP5.9 XP6.1 | length 43
  Top Layer w0.3: XP6.1 XP6.1@22.35,35 ; RV1.3 RV1.3@24.9,28.1 ; DD5.64 v1(30.45,15.05) ; C11.1@36.35,27.175 36.567,26.808 37,26.325 DD5.39 ; v1(36.95,12.075) 37.5,12.875 DD5.11 ; v1@39.5,20.75 DD5.27 ; v1(39.9,18.75) DD5.23 ; R5.1@40.074,6.524 R5.1 R6.1 R7.1 40.05,11.65 C10.1 C10.1@40.175,11.725 ; C7.2 v1(64.4,5.5) ; v1(68.05,5.575) C6.2@68.05,6.675
  Top Layer w0.4: C14.1 v1(30.225,10.45)
  Top Layer w0.5: v1(16.325,12.475) 17.465,12.475 ccw(c17.465,12.56) C3.1 ; C13.1 ccw(c19.169,7.806) 19.425,7.806 v1(19.425,9.05) ; XP6.1 22.1,34.9 22.1,32.578 C23.1 ; v1(23.025,11.4) 23.025,12.459 cw(c23.366,12.459) C4.1 ; v1(24.45,26.875) RV1.3 ; C17.1 ccw(c27.483,12.983) 27.483,12.3 v1(28.35,12.3) ; DD4.4@28.373,5.218 DD4.4 ; v1(30.05,23.9) 30.091,23.9 30.146,23.954 DD5.49@30.146,23.338 ; C14.1 C14.1@30.375,12.025 ; C18.1@35.296,7.604 C18.1 cw(c36.224,8.124) 35.2,8.124 v1(35.2,8.5) v1@35.296,8.404 ; v1(36.175,28.4) C11.1 ; C10.1@40.175,11.725 40.575,11.325 v1(41.125,11.325) ; v1(43.375,27.825) 44.55,27.825 C9.1 ; C24.1 v1@46.65,15.25 ; C2.1 45.687,21.562 46.737,21.562 v1(46.575,21.725) ; C8.1@45.687,18.512 v1@46.737,18.512 ; C21.1 v1(52.75,17) C20.1 ; C22.1@53.736,29.686 C22.1 53.775,27.615 XP4.3
  other v1: 29.375,5.225 61.65,12.45 66.55,12.45 51.25,13.25 7.25,14.5 46.738,15.338 56.325,15.525 58.05,15.975 7.25,16 51,17 56.2,17.85 58.2,17.875 8.25,18 46.825,18.6 39.5,20.725 25.15,22.675 19.25,22.75 11.25,26 31.975,30.05
GPIO: DD5.26 R2.2 | length 17.7
  Top Layer w0.3: DD5.26 46.725,20.25 48.125,21.65 56.95,21.65 57.55,22.25 R2.2@58.9,22.25
LDB0: DD5.43 XP6.7 | length 40.5
  Top Layer w0.3: XP6.7 36,37.25 49.25,37.25 50.25,36.25 50.25,34.25 49.75,33.5 39.5,28.45 37.85,28.45 36.95,29.35 35.725,29.35 35,28.625 DD5.43
LDB1: DD5.44 XP6.8 | length 37.3
  Top Layer w0.3: DD5.44 34.5,29.15 35.275,29.925 37.45,29.925 38.275,29.1 39.15,29.1 43,31 48.75,33.75 49.5,34.5 49.5,36 49,36.5 36.5,36.5 36,36 XP6.8
LDB2: DD5.45 XP6.9 | length 15.3
  Top Layer w0.3: DD5.45 34,29.7 34.875,30.575 38.124,30.575 38.624,30.075 v1(38.65,30.075)
  Bottom Layer w0.3: XP6.9 39.3,33.7 39.3,31.625 38.65,30.975 v1(38.65,30.075)
LDB3: DD5.46 XP6.10 | length 16.2
  Top Layer w0.3: DD5.46 33.5,30.175 34.525,31.2 38.857,31.2 v1(40,30.7)
  Bottom Layer w0.3: v1(40,30.7) XP6.10
LDB4: DD5.47 XP6.11 | length 14.7
  Top Layer w0.3: DD5.47 33,26.75 ; 33,30.625 34.2,31.825 40.116,31.825 v1(41.3,31.475)
  Bottom Layer w0.3: v1(41.3,31.475) 40.65,32.125 40.65,33.65 XP6.11 XP6.11@42.025,34.975
LDB5: DD5.50 XP6.12 | length 25.9
  Top Layer w0.3: DD5.50 29.35,22.75 29.125,22.975 29.125,30.85 31.925,33.65 42.65,33.65 XP6.12
LDB6: DD5.51 XP6.13 | length 28.2
  Top Layer w0.3: DD5.51 31.55,22.25 31.75,22.45 31.75,23.5 29.9,25.35 29.9,30.575 32.375,33.05 43.5,33.05 45.537,34.228 XP6.13
LDB7: DD5.52 XP6.14 | length 30.1
  Top Layer w0.3: DD5.52 31.875,21.75 32.375,22.25 32.375,23.75 30.575,25.55 30.575,30.175 32.825,32.425 44.25,32.425 47.35,34.025 XP6.14
LED: DD1.10 DD5.42 | length 16.3
  Top Layer w0.3: v1(23.45,21) 23.501,21 23.976,20.525 DD1.10 ; v1(34.1,23.725) 34.825,23.725 35.5,24.4 DD5.42
  Bottom Layer w0.4: v1(23.45,21) 31.375,21 v1(34.1,23.725)
LEDO: DD1.14 R1.2 | length 18.4
  Top Layer w0.4: R1.2 11.925,30.575 16.175,30.575 17.5,29.25 17.5,21.825 18.15,21.175 DD1.14
LRS: DD5.55 XP6.4 | length 18
  Top Layer w0.3: XP6.4 28,34.712 27.125,33.837 27.125,21.025 27.9,20.25 DD5.55
LRW: DD5.54 XP6.5 | length 17.4
  Top Layer w0.3: XP6.5 27.8,32.8 27.8,21.375 28.425,20.75 DD5.54
LSTR: DD5.53 XP6.6 | length 16.9
  Top Layer w0.3: DD5.53 28.975,21.25 28.475,21.75 28.475,31.475 XP6.6
LVR: RV1.2 XP6.3 | length 10.4
  Top Layer w0.3: RV1.2 25.55,29.25 26,29.7 XP6.3
  Top Layer w0.4: RV1.2@21.25,28.95 RV1.2
MODE0: DD5.6 R5.2 | length 9.7
  Top Layer w0.3: DD5.6 35,10.3 37,8.3 37,7 37.5,6.5 R5.2 R5.2@38.094,6.856
MODE1: DD5.7 R6.2 | length 7.1
  Top Layer w0.3: DD5.7 35.5,10.8 37.675,8.625 38.075,8.625 R6.2 R6.2@38.225,8.25
MODE2: DD5.8 R7.2 | length 5.9
  Top Layer w0.3: DD5.8 36,11.4 37.4,10 R7.2 R7.2@38.075,10.375
Net3_1: 3.1 R1.1 | length 3.6
  Top Layer w0.4: 3.1 R1.1
Net5_1: 5.1 R2.1 | length 68.1
  Top Layer w0.4: 5.1 13.97,33.852 ccw(c15.265,37.838) 15.425,33.65 15.625,33.65 ccw(c15.625,36.425) 18.4,36.425 18.4,36.97 cw(c19.63,36.97) 19.63,38.2 48.823,38.2 cw(c48.823,35.66) 50.619,37.456 53.656,34.419 v1(57,31.7) ; R2.1@61.075,21.9 61.375,22.2 v1(62.3,22.2)
  Bottom Layer w0.3: v1(57,31.7) 58.45,30.25 58.45,23.45 59.65,22.25 v1@62.05,22.25
NetDD4_3: DD4.3 R4.2 | length 9.3
  Top Layer w0.3: R4.2 23.475,6.5 23.475,3.8 23.875,3.4 26.725,3.4 27.135,3.81 DD4.3 DD4.3@27.183,5.298
NetDD4_7: DD4.7 R3.2 | length 4.8
  Top Layer w0.3: R3.2 22.774,8.851 23.524,8.851 24.075,8.3 25.3,8.3 25.817,8.817 25.817,10.002 DD4.7
NRST: C24.2 DD5.18 R17.1 XP5.10 | length 45.2
  Top Layer w0.3: DD5.18 43,16.25 C24.2@43.675,15.825 ; C24.2@43.925,15.125 C24.2 43.8,14.25 44.05,14 47.325,14 49.575,11.75 52.25,11.75 54.275,13.775 v1(54.275,20.025) ; v1(52.45,25.225) 54.7,25.225 56.925,27.45 56.925,28.675 58.325,30.075 58.625,31.45 58.9,31.725 62.05,31.725 ; R17.1@62.05,30.75 62.05,31.725 ; XP5.10 63.2,31.725 62.05,31.725
  Bottom Layer w0.3: v1(52.45,25.225) 52.45,21.85 v1(54.275,20.025)
OSCI: C21.2 DD5.19 ZQ1.2 | length 11.6
  Top Layer w0.3: DD5.19 43.525,16.75 43.65,16.625 47.185,16.625 ZQ1.2 C21.2
OSCO: C20.2 DD5.20 ZQ1.1 | length 11.5
  Top Layer w0.3: DD5.20 46.875,17.25 ZQ1.1 C20.2
RBCR: DD5.25 R8.2 | length 25.8
  Top Layer w0.3: DD5.25 43.375,19.75 43.525,19.6 47.1,19.6 48.475,20.975 54.975,20.975 55.475,20.475 55.475,19.4 54.975,18.9 54.975,13.275 54.5,12.8 R8.2
RBLN: DD5.15 RN1.8 | length 11.2
  Top Layer w0.3: v1(38.775,15.25) 38.875,15.25 39.5,14.625 DD5.15 ; v1(43.95,9.7) 44.575,9.075 RN1.8
  Bottom Layer w0.3: v1(38.775,15.25) 41.725,12.6 43.473,10.852 cw(c42.32,9.7) v1(43.95,9.7)
RBLV: DD5.22 RN1.7 | length 22.3
  Top Layer w0.3: v1(38.775,16.725) 40.175,17.625 40.8,18.25 DD5.22 ; v1@42.9,10.475 v1(42.575,10.475) 43.875,10.75 45.2,10.75 46.1,9.85 RN1.7
  Bottom Layer w0.3: v1(38.775,16.725) 39.75,15.5 44.544,10.706 cw(c43.562,9.725) 44.95,9.725 44.95,9.7 cw(c44,9.7) 44,8.75 cw(c44,10.175) 42.575,10.175 v1(42.575,10.475)
RBRN: DD5.21 RN1.5 | length 14.3
  Top Layer w0.3: DD5.21 41.125,17.75 40.725,17.35 40.725,14.925 43.5,12.15 46.375,12.15 47.7,10.825 RN1.5
RBRV: DD5.16 RN1.6 | length 9.8
  Top Layer w0.3: DD5.16 40,13.152 40.012,13.14 40.81,13.14 42.525,11.425 45.75,11.425 46.9,10.275 RN1.6
SPCLK: DD4.6 DD5.3 | length 11.8
  Top Layer w0.3: DD4.6 27.146,10.039 27.146,8.779 27.525,8.4 30.7,8.4 33.5,10.3 DD5.3
SPFSS: DD4.1 DD5.4 | length 15.8
  Top Layer w0.3: DD4.1@24.626,5.281 DD4.1 24.595,6.52 25.675,7.6 31.2,7.6 34,9.8 DD5.4
SPRXD: DD4.2 DD5.5 | length 15.5
  Top Layer w0.3: DD4.2 25.865,6.54 26.25,6.925 32.125,6.925 34.5,9.3 DD5.5
SPTXD: DD4.5 DD5.2 | length 8.1
  Top Layer w0.3: DD4.5 28.484,9.971 29.029,9.971 29.6,9.4 30.5,9.4 33,10.775 DD5.2
TCK: DD5.32 R14.1 XP5.4 | length 25.4
  Top Layer w0.3: DD5.32 42.925,23.25 46.531,23.875 49.7,23.875 50.625,22.95 55.525,22.95 58.325,25.75 61.75,25.75 62,26 62,26.601 61.951,26.651 62.05,26.75 R14.1 XP5.4
TDI: DD5.34 R16.1 XP5.8 | length 31.7
  Top Layer w0.3: DD5.34 39.5,24.3 39.775,24.025 40.325,24.025 40.925,24.625 43.275,24.7 45.475,25.175 50.7,25.175 51.625,24.25 54.725,24.25 57.9,27.425 57.9,28.575 59.05,29.725 61.874,29.725 62.05,29.549 62.05,28.75 62.084,28.773 XP5.8
TDO: DD5.30 XP5.6 | length 29.3
  Top Layer w0.3: DD5.30 41,22.25 40.75,22.5 40.75,23.525 41.225,24 43.325,24 45.95,24.525 50.375,24.525 51.325,23.575 54.95,23.575 59.125,27.75 63,27.75 XP5.6
TMS: DD5.31 R13.1 XP5.2 | length 25.3
  Top Layer w0.3: DD5.31 49.727,22.698 50.1,22.325 56.075,22.325 58.875,25.125 61.725,25.125 62.025,24.825 62.025,24.05 R13.1@61.951,23.976 ; R13.1@62.1,24.075 63,24.075 XP5.2
TRST: DD5.33 R15.1 XP5.7 | length 38.4
  Top Layer w0.3: DD5.33@40.012,25.322 DD5.33 40,25.413 40.012,25.425 43.05,25.425 45.5,25.875 51.525,25.875 51.85,26.2 54.45,26.2 56,27.75 56,28.9 57.625,30.525 58.425,33.15 59.525,34.25 62.05,34.25 ; R15.1@62.05,32.75 62.05,34.25 ; XP5.7 67.908,31.658 ccw(c66.841,32.725) 68.35,32.725 ccw(c66.825,32.725) 66.825,34.25 62.05,34.25
WKUP: DD5.17 R12.1 | length 12.7
  Top Layer w0.3: DD5.17@42.484,15.75 DD5.17 42.06,14.74 43.6,13.2 46.8,13.2 50.25,9.75 R12.1@50.25,8.85 ; R12.1@50.351,8.599 R12.1
pads on no net: DD5.9 DD5.10 DD5.14 DD5.37

## Polygon pours and split planes (outlines as drawn)
+VM on Top Layer "+VM_L01_P010" (solid, remove dead copper, pour order 10): 30.25,0.5 43.925,0.5 43.925,28.5 30.25,28.5
GND on Top Layer "GND_L01_P008" (solid, pour order 8): 0.5,38.5 0.5,0.5 31.25,0.5 31.25,28 43.35,28 43.35,12.5 39.5,12.5 39.5,0.5 70.5,0.5 70.5,38.5
GND on Top Layer "GND_L01_P006" (solid, pour order 6): 0.75,38.25
GND on Top Layer "GND_L01_P004" (solid, pour order 4): 0.5,38.5
+3V3 on Top Layer "+3V3_L01_P002" (solid, pour order 2): 1,1 1,12.2 cw(c1.6,12.2) 1.6,12.8 9,12.8 cw(c9,12.5) 9.3,12.5 9.3,9 ccw(c10,9) 10,8.3 13.25,8.3 13.25,3.75 28.75,3.75 ccw(c28.75,5.25) 30.25,5.25 cw(c31.25,5.25) 31.25,6.25 36.5,6.25 41,3.25 55.25,3.25 ccw(c55.25,5) 57,5 57,5.514 ccw(c55.464,5.514) 56.55,6.6 56.2,6.95 cw(c57.286,8.036) 55.75,8.036 cw(c56.714,8.036) 56.714,9 59.25,9 cw(c59.25,8.25) 60,8.25 60,0.75
GND on Bottom Layer "GND_L02_P000" (solid, pour order 0): 0.5,38.5 0.5,0.5 70.5,0.5 70.5,38.5

## Other copper
Top Layer:
  region net +VM: 55.5,14.2 cw(c55.8,14.2) 55.8,14.5 58.625,14.5 ccw(c58.625,15.5) 59.625,15.5 59.625,19.8 61.675,19.8 61.675,15.545 cw(c60.48,15.545) 61.325,14.7 60.794,14.169 ccw(c62.59,12.373) 60.05,12.373 60.05,9.1 cw(c59.7,9.1) 59.7,8.75 56.35,8.75 ccw(c56.35,8.4) 56,8.4 55.5,8.4
  region net GND: 59.25,18.025 ccw(c58.7,18.025) 58.7,18.575 55.625,18.575 ccw(c55.625,18.45) 55.5,18.45 55.5,15.175 ccw(c55.825,15.175) 55.825,14.85 58.6,14.85 ccw(c58.6,15.5) 59.25,15.5
  region net GND: 61.4,9.975 61.4,10.896 cw(c62.797,10.896) 61.809,11.884 62.095,12.17 cw(c62.65,11.615) 62.65,12.4 63.85,12.4 ccw(c63.85,12.425) 63.875,12.425 63.875,13.575 ccw(c63.85,13.575) 63.85,13.6 62.425,13.6 ccw(c62.425,12.634) 61.742,13.317 61.344,12.919 ccw(c61.935,12.329) 61.1,12.329 61.1,9.975
  region net GND: 66.3,9.975 66.3,10.896 cw(c67.697,10.896) 66.709,11.884 66.995,12.17 cw(c67.55,11.615) 67.55,12.4 68.75,12.4 ccw(c68.75,12.425) 68.775,12.425 68.775,13.575 ccw(c68.75,13.575) 68.75,13.6 67.325,13.6 ccw(c67.325,12.634) 66.642,13.317 66.244,12.919 ccw(c66.835,12.329) 66,12.329 66,9.975
  region net +3V3: 68.525,9.975 ccw(c68.525,10.225) 68.775,10.225 68.775,11.775 ccw(c68.725,11.775) 68.725,11.825 67.433,11.825 ccw(c67.433,11.142) 66.95,11.625 66.694,11.369 ccw(c67.164,10.9) 66.5,10.9 66.5,9.975
  region net +3V3: 63.625,9.975 ccw(c63.625,10.225) 63.875,10.225 63.875,11.775 ccw(c63.825,11.775) 63.825,11.825 62.533,11.825 ccw(c62.533,11.142) 62.05,11.625 61.794,11.369 ccw(c62.264,10.9) 61.6,10.9 61.6,9.975